# Altium PCB 10515.0502_CVSP1_2020（2拼版）2020.1019.PcbDoc (part 2 of 3)
Units mm, origin at the board's own origin, x right, y up, seen from the top; angles counter-clockwise.
Board outline 162.18 x 163.99 mm, 2 copper layers (Top Layer, Bottom Layer); 124 components, 0 nets, 386 pads, 70 vias.
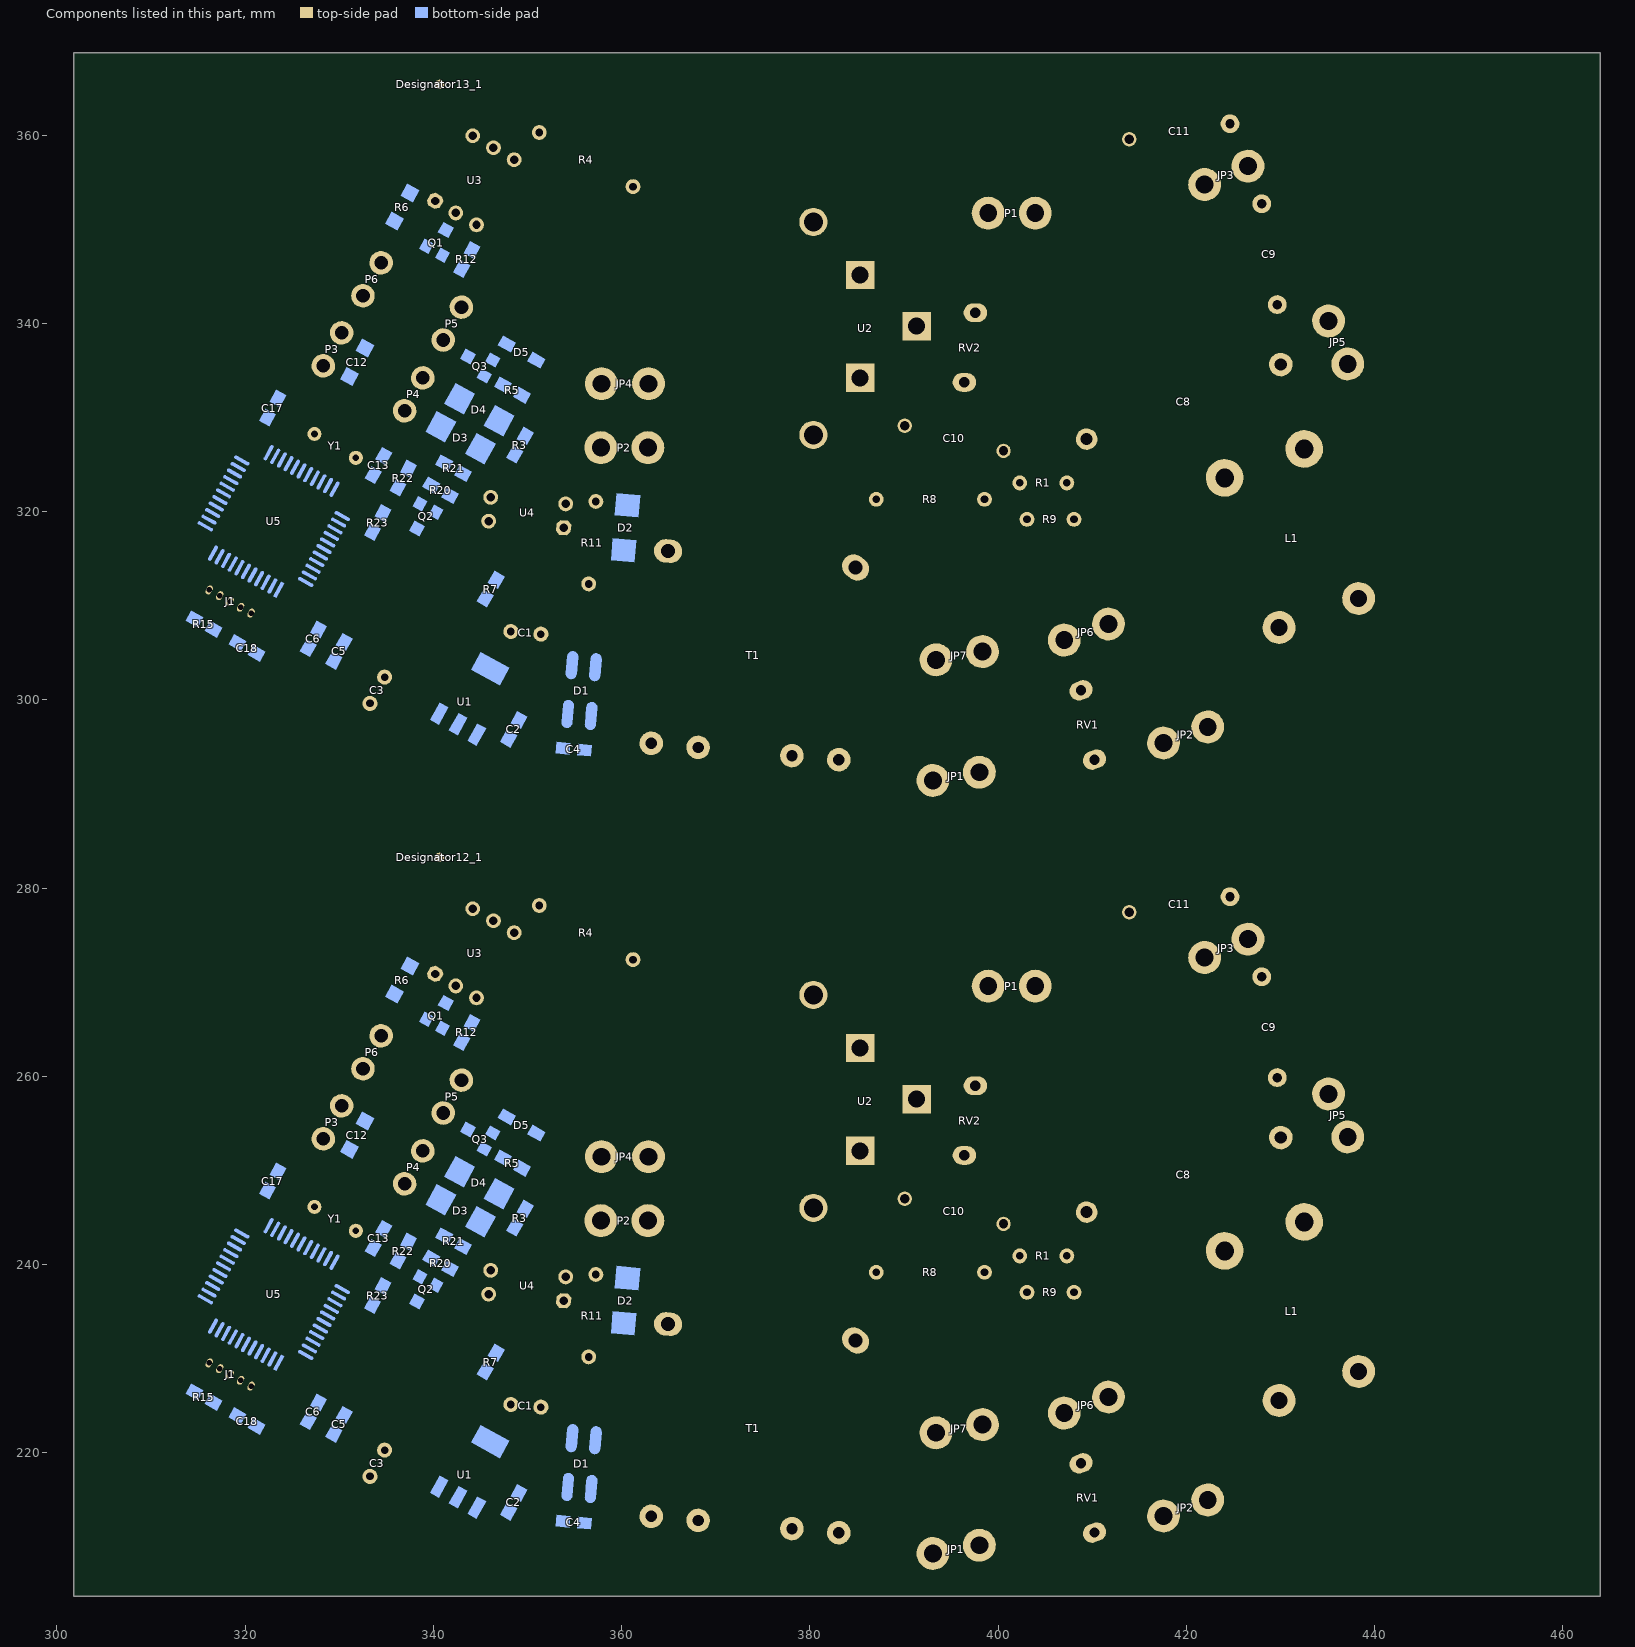
[diagram p2: the components of this part, seen from the top]

## Via types
v1: diameter 0.7, hole 0.4, Top Layer to Bottom Layer, tented both sides, 46 vias
v2: diameter 0.8, hole 0.4, Top Layer to Bottom Layer, tented both sides, 24 vias

## Nets (pads, with @x,y where several pads share a name; then routed paths per layer and width w, separated by ;. In a path a pad name is that pad's centre, name@x,y a point inside that pad or via, vN(x,y) a via of type N, cw(c..) or ccw(c..) an arc to the next point about the centre after c; other vN are vias at no path point) (continued)
copper on no net: | length 5456.2
  Top Layer w0.254: v2(320.85,241.633) 331.778,236.548 ; v2(320.85,323.763) 331.778,318.678 ; v2@320.944,241.376 cw(c321.17,240.757) 321.448,241.355 cw(c321.726,241.952) v2@321.107,241.726 ; v2@320.944,323.506 cw(c321.17,322.887) 321.448,323.485 cw(c321.726,324.082) v2@321.107,323.856 ; v2(324.063,241.128) 331.091,237.729 331.22,237.6 ccw(c333.016,239.396) 333.016,236.856 341.836,236.856 345.877,236.856 ; v2(324.063,323.258) 331.091,319.859 331.22,319.73 ccw(c333.016,321.526) 333.016,318.986 341.836,318.986 345.877,318.986 ; v2@324.153,240.87 cw(c324.369,240.248) 324.656,240.841 cw(c324.943,241.434) v2@324.321,241.218 ; v2@324.153,323 cw(c324.369,322.378) 324.656,322.971 cw(c324.943,323.564) v2@324.321,323.348 ; v2@327.743,244.17 ccw(c327.577,244.808) 328.145,244.475 ccw(c328.714,244.141) v2@328.076,243.975 ; v2@327.743,326.3 ccw(c327.577,326.938) 328.145,326.605 ccw(c328.714,326.271) v2@328.076,326.105 ; v2(327.812,243.906) v2(329.599,246.954) 331.178,249.748 331.305,250.002 v1@334.416,255.844 ; v2(327.812,326.036) v2(329.599,329.084) 331.178,331.878 331.305,332.132 v1@334.416,337.974 ; 329.265,328.515 cw(c329.834,328.182) v2@329.668,328.82 ; 329.266,328.516 ccw(c328.697,328.849) v2@329.335,329.015 ; v2@329.335,246.885 cw(c328.697,246.719) 329.266,246.386 cw(c329.834,246.052) v2@329.668,246.69 ; v2@329.526,247.217 ccw(c329.349,247.852) 329.923,247.528 ccw(c330.497,247.204) v2@329.862,247.027 ; v2@329.526,329.347 ccw(c329.349,329.982) 329.923,329.658 ccw(c330.497,329.334) v2@329.862,329.157 ; 330.259,256.86 330.869,256.477 330.315,256.82 ; 330.259,338.99 330.869,338.607 330.315,338.95 ; 331.235,236.801 cw(c330.899,236.079) v1@331.691,236.156 ; 331.235,318.931 cw(c330.899,318.209) v1@331.691,318.286 ; 331.637,236.614 cw(c331.412,236.129) v1@331.944,236.181 ; 331.637,318.744 cw(c331.412,318.259) v1@331.944,318.311 ; v1@331.74,236.318 ccw(c331.555,236.467) 331.778,236.548 ; v1@331.74,318.448 ccw(c331.555,318.597) 331.778,318.678 ; v1(331.913,236.178) 331.778,236.548 ; v1(331.913,318.308) 331.778,318.678 ; v1@331.955,236.397 cw(c332.001,236.63) 331.778,236.548 ; v1@331.955,318.527 cw(c332.001,318.76) 331.778,318.678 ; 334.107,255.264 cw(c334.699,254.948) v1@334.503,255.59 ; 334.107,337.394 cw(c334.699,337.078) v1@334.503,337.72 ; 334.195,255.428 ccw(c333.836,255.619) v1@334.225,255.738 ; 334.195,337.558 ccw(c333.836,337.749) v1@334.225,337.868 ; v1(335.419,239.012) 336.853,237.578 v1(342.688,237.578) ; v1(335.419,321.142) 336.853,319.708 v1(342.688,319.708) ; 335.513,220.468 335.588,220.181 335.679,219.834 335.691,219.785 335.777,219.457 ; 335.513,302.598 335.588,302.311 335.679,301.964 335.691,301.915 335.777,301.587
  Top Layer w0.3: 318.033,232.476 317.716,231.904 ; 318.033,314.606 317.716,314.035 ; 318.129,227.83 cw(c318.452,227.644) 318.355,228.004 ; 318.129,309.96 cw(c318.452,309.774) 318.355,310.134 ; 318.137,227.843 ccw(c317.832,228.018) 318.171,228.11 ; 318.137,309.973 ccw(c317.832,310.148) 318.171,310.24 ; 318.137,227.831 cw(c318.456,227.653) 318.357,228.004 ; 318.137,309.961 cw(c318.456,309.783) 318.357,310.134 ; 318.139,227.835 ccw(c317.826,228.011) 318.172,228.108 ; 318.139,309.965 ccw(c317.826,310.141) 318.172,310.238 ; 319.524,227.708 320.065,228.729 319.791,229.217 317.779,230.38 316.319,231.142 316.255,231.523 316.573,232.095 317.843,234.127 v2(320.256,238.635) ; 319.524,309.838 320.065,310.86 319.791,311.347 317.779,312.511 316.319,313.273 316.255,313.654 316.573,314.225 317.843,316.257 v2(320.256,320.766) ; 319.577,228.026 ccw(c319.474,228.36) 319.783,228.196 ; 319.577,310.156 ccw(c319.474,310.49) 319.783,310.326 ; 319.764,227.927 cw(c320.123,228.037) 319.791,228.213 ; 319.764,310.057 cw(c320.123,310.167) 319.791,310.343 ; v2@319.999,239.937 cw(c319.531,240.319) 319.591,239.718 cw(c319.651,239.118) v2@320.034,239.585 ; v2@319.999,322.067 cw(c319.531,322.449) 319.591,321.848 cw(c319.651,321.248) v2@320.034,321.715 ; v2@320.016,238.563 cw(c319.439,238.388) 319.971,238.103 cw(c320.503,237.819) v2@320.328,238.396 ; v2@320.016,320.693 cw(c319.439,320.518) 319.971,320.233 cw(c320.503,319.949) v2@320.328,320.526 ; v2(320.192,239.778) 319.557,239.715 317.017,241.112 316.319,241.048 311.246,231.333 311.493,230.253 312.001,228.416 316.636,225.808 316.954,225.872 317.589,226.888 317.7,227.082 ; v2(320.192,321.909) 319.557,321.845 317.017,323.242 316.319,323.179 311.246,313.463 311.493,312.384 312.001,310.546 316.636,307.939 316.954,308.002 317.589,309.018 317.7,309.212 ; v2@320.334,237.164 cw(c319.759,236.983) 320.293,236.704 cw(c320.828,236.424) v2@320.648,237 ; v2@320.334,319.294 cw(c319.759,319.113) 320.293,318.834 cw(c320.828,318.554) v2@320.648,319.13 ; v2(320.573,237.238) 319.113,234.444 317.716,231.904 ; v2(320.573,319.369) 319.113,316.575 317.716,314.035 ; 320.635,227.092 321.335,228.348 320.971,229.174 319.049,230.333 318.007,230.989 317.87,231.42 ; 320.635,309.222 321.335,310.479 320.971,311.304 319.049,312.463 318.007,313.119 317.87,313.55 ; 320.691,227.411 ccw(c320.591,227.761) 320.909,227.584 ; 320.691,309.541 ccw(c320.591,309.891) 320.909,309.714 ; 320.876,227.308 cw(c321.223,227.407) 320.908,227.582 ; 320.876,309.438 cw(c321.223,309.537) 320.908,309.712 ; 317.7,227.082 317.716,227.078 318.413,228.324 317.7,227.082 ; 317.7,309.212 317.716,309.209 318.413,310.454 317.7,309.212 ; 317.716,231.904 317.868,231.426 ; 317.716,314.035 317.868,313.556 ; 317.868,231.426 317.87,231.42 ; 317.868,231.426 317.867,231.421 317.87,231.42 ; 317.868,313.556 317.87,313.55 ; 317.868,313.556 317.867,313.551 317.87,313.55
  Top Layer w0.508: v2(324.955,224.284) 326.415,226.951 327.622,227.512 339.75,221.3 341.211,221.49 343.525,225.863 v2(344.068,226.888) ; v2(324.955,306.415) 326.415,309.082 327.622,309.642 339.75,303.43 341.211,303.621 343.525,307.993 v2(344.068,309.018) ; 334.964,219.761 cw(c335.302,218.487) 335.964,219.627 cw(c336.626,220.766) 335.352,220.429 ; 334.964,301.891 cw(c335.302,300.617) 335.964,301.757 cw(c336.626,302.896) 335.352,302.559 ; 335.738,220.16 335.588,220.181 334.824,220.289 ; 335.738,302.29 335.588,302.311 334.824,302.419 ; v1(337.063,268.106) v1@345.238,264.053 ; v1(337.063,350.236) v1@345.238,346.183 ; 345.328,214.693 349.321,219.329 ; 345.328,296.823 349.321,301.459 ; 345.609,213.913 cw(c344.946,212.876) v2@346.148,213.141 ; 345.609,296.043 cw(c344.946,295.006) v2@346.148,295.271 ; 345.634,213.897 cw(c345.01,212.919) v2@346.147,213.144 ; 345.634,296.027 cw(c345.01,295.049) v2@346.147,295.274 ; 345.946,213.637 ccw(c346.438,213.331) v2@346.044,212.907 ; 345.946,295.767 ccw(c346.438,295.461) v2@346.044,295.037 ; 346.272,214.16 ccw(c346.865,213.791) v2@346.39,213.279 ; 346.272,296.29 ccw(c346.865,295.921) v2@346.39,295.409 ; 347.725,224.972 cw(c346.467,224.577) 347.635,223.967 cw(c348.804,223.356) 348.409,224.614 ; 347.725,307.102 cw(c346.467,306.707) 347.635,306.097 cw(c348.804,305.486) 348.409,306.744 ; 347.911,224.704 cw(c347.376,224.018) 348.246,224.018 ; 347.911,306.834 cw(c347.376,306.148) 348.246,306.148 ; 348.262,222.515 348.246,222.531 348.246,222.837 ; 348.262,304.645 348.246,304.661 348.246,304.967 ; 348.582,224.704 ccw(c349.116,224.018) 348.246,224.018 ; 348.582,306.834 ccw(c349.116,306.148) 348.246,306.148 ; 348.865,217.688 349.256,219.093 ; 348.865,299.818 349.256,301.223 ; 349.543,221.64 ccw(c349.795,222.009) v2@349.877,221.57 ; 349.543,303.77 ccw(c349.795,304.139) v2@349.877,303.7 ; 349.806,219.337 349.91,220.665 v2@349.904,221.394 ; 349.806,301.467 349.91,302.795 v2@349.904,303.524 ; v2@349.829,221.302 cw(c349.205,220.262) 350.382,220.556 ; v2@349.829,303.432 cw(c349.205,302.392) 350.382,302.686 ; 334.824,220.289 335.777,219.457 336.575,218.76 v2(346.291,213.172) ; 334.824,220.289 335.691,219.785 343.687,215.14 345.492,213.987 345.973,213.68 ; 334.824,302.419 335.777,301.587 336.575,300.89 v2(346.291,295.302) ; 334.824,302.419 335.691,301.915 343.687,297.271 345.492,296.117 345.973,295.81 ; 345.973,213.68 v2(346.291,213.172) ; 345.973,213.68 346.412,214.385 346.724,214.887 346.962,215.269 347.751,216.537 349.256,219.093 ; 345.973,295.81 v2(346.291,295.302) ; 345.973,295.81 346.412,296.515 346.724,297.017 346.962,297.399 347.751,298.668 349.256,301.223 ; v2(346.291,213.172) 350.418,220.411 350.228,221.173 v2@349.904,221.394 ; v2(346.291,295.302) 350.418,302.541 350.228,303.303 v2@349.904,303.524 ; 348.246,222.837 347.751,223.332 347.751,223.522 348.246,224.018 ; 348.246,222.837 349.15,221.933 349.15,221.909 ; 348.246,222.837 348.246,224.018 ; 348.246,224.018 348.246,225.135 347.37,223.459 347.624,222.951 347.889,222.77 349.15,221.909 ; 348.246,304.967 347.751,305.462 347.751,305.653 348.246,306.148 ; 348.246,304.967 349.15,304.063 349.15,304.039 ; 348.246,304.967 348.246,306.148 ; 348.246,306.148 348.246,307.265 347.37,305.589 347.624,305.081 347.889,304.9 349.15,304.039 ; 349.15,221.909 349.889,221.404 v2@349.896,221.399 ; 349.15,304.039 349.889,303.534 v2@349.896,303.529 ; 349.256,219.093 349.321,219.329 ; 349.256,301.223 349.321,301.459 ; 349.321,219.329 v2@349.896,221.399 ; 349.321,301.459 v2@349.896,303.529 ; v2@349.896,221.399 v2(349.904,221.427) v2@349.904,221.394 ; v2@349.896,221.399 v2@349.904,221.394 ; v2@349.896,303.529 v2(349.904,303.557) v2@349.904,303.524 ; v2@349.896,303.529 v2@349.904,303.524
  Top Layer w0.6: 353.847,236.159 362.483,235.27 v1(366.353,238.196) ; 353.847,318.289 362.483,317.4 v1(366.353,320.326) ; 354.155,235.781 cw(c354.897,234.868) 355.018,236.039 cw(c355.138,237.209) 354.225,236.467 ; 354.155,317.911 cw(c354.897,316.998) 355.018,318.169 cw(c355.138,319.339) 354.225,318.597
  Top Layer w0.8: 328.213,257.928 330.259,256.86 ; 328.213,340.058 330.259,338.99 ; 329.411,255.329 330.259,256.86 ; 329.411,337.459 330.259,338.99 ; 329.448,256.605 ccw(c327.49,255.99) 328.44,257.809 ccw(c329.389,259.629) 330.004,257.671 ; 329.448,338.735 ccw(c327.49,338.12) 328.44,339.939 ccw(c329.389,341.759) 330.004,339.801 ; v2(329.599,246.954) v1@334.416,255.844 ; v2(329.599,329.084) v1@334.416,337.974 ; 330.035,257.68 ccw(c329.495,259.66) 331.277,258.642 ccw(c333.059,257.623) 331.079,257.084 ; 330.035,339.81 ccw(c329.495,341.79) 331.277,340.772 ccw(c333.059,339.753) 331.079,339.214 ; 330.495,256.043 cw(c331.063,254.071) 332.055,255.868 cw(c333.047,257.664) 331.076,257.095 ; 330.495,338.173 cw(c331.063,336.201) 332.055,337.998 cw(c333.047,339.794) 331.076,339.225 ; 331.313,258.704 330.259,256.86 ; 331.313,340.834 330.259,338.99 ; 331.938,265.816 334.463,264.303 ; 331.938,347.946 334.463,346.433 ; 332.438,255.656 330.259,256.86 ; 332.438,337.786 330.259,338.99 ; 333.615,262.772 334.463,264.303 ; 333.615,344.902 334.463,346.433 ; 333.638,264.096 ccw(c331.648,263.598) 332.703,265.358 ccw(c333.758,267.118) 334.256,265.128 ; 333.638,346.226 ccw(c331.648,345.728) 332.703,347.488 ccw(c333.758,349.248) 334.256,347.258 ; 334.209,265.114 ccw(c333.597,267.073) 335.415,266.121 ccw(c337.233,265.169) 335.274,264.557 ; 334.209,347.244 ccw(c333.597,349.203) 335.415,348.251 ccw(c337.233,347.299) 335.274,346.687 ; v1(334.438,255.803) 337.742,262.411 ; v1(334.438,337.933) 337.742,344.541 ; 334.463,263.453 cw(c334.463,261.401) 335.914,262.852 cw(c337.365,264.303) 335.313,264.303 ; 334.463,345.583 cw(c334.463,343.531) 335.914,344.982 cw(c337.365,346.433) 335.313,346.433 ; 335.788,266.832 334.463,264.303 ; 335.788,348.962 334.463,346.433 ; 336.688,253.116 338.888,252.078 ; 336.688,335.246 338.888,334.208 ; 338.04,250.547 338.888,252.078 ; 338.04,332.677 338.888,334.208 ; 338.088,251.791 ccw(c336.156,251.098) 337.032,252.954 ccw(c337.908,254.81) 338.601,252.878 ; 338.088,333.921 ccw(c336.156,333.228) 337.032,335.084 ccw(c337.908,336.94) 338.601,335.008 ; v1(338.163,243.703) 345.125,239.916 346.099,239.387 ; v1(338.163,325.833) 345.125,322.046 346.099,321.517 ; 339.069,251.248 cw(c339.506,249.242) 340.615,250.969 cw(c341.724,252.696) 339.719,252.259 ; 339.069,333.378 cw(c339.506,331.372) 340.615,333.099 cw(c341.724,334.826) 339.719,334.389 ; 339.897,253.81 338.888,252.078 ; 339.897,335.94 338.888,334.208 ; v1(340.313,235.628) 340.313,235.278 340.813,234.778 343.788,234.778 344.363,234.203 344.363,227.183 v2(344.068,226.888) ccw(c343.356,227.6) 344.363,227.6 ; v1(340.313,317.758) 340.313,317.408 340.813,316.908 343.788,316.908 344.363,316.333 344.363,309.313 v2(344.068,309.018) ccw(c343.356,309.73) 344.363,309.73 ; 340.913,250.778 338.888,252.078 ; 340.913,332.908 338.888,334.208 ; 341.049,256.105 348.899,248.254 349.913,247.24 v1(349.913,243.378) 349.913,230.132 351.434,228.611 351.434,224.856 ; 341.049,338.235 348.899,330.384 349.913,329.37 v1(349.913,325.508) 349.913,312.262 351.434,310.741 351.434,306.986 ; 345.887,239.711 ccw(c345.375,240.494) 346.291,240.302 ccw(c347.206,240.11) 346.423,239.598 ; 345.887,321.841 ccw(c345.375,322.624) 346.291,322.432 ccw(c347.206,322.24) 346.423,321.728 ; 346.099,238.999 cw(c346.099,237.034) 347.488,238.424 ; 346.099,321.129 cw(c346.099,319.164) 347.488,320.554 ; 346.501,225.328 348.246,225.135 ; 346.501,241.303 346.099,239.387 ; 346.501,307.458 348.246,307.265 ; 346.501,323.433 346.099,321.517 ; 347.934,224.885 ccw(c347.18,224.281) 347.286,225.241 ccw(c347.393,226.201) 347.996,225.447 ; 347.934,307.015 ccw(c347.18,306.411) 347.286,307.371 ccw(c347.393,308.331) 347.996,307.577 ; 347.963,225.418 ccw(c347.28,226.101) 348.246,226.101 ccw(c349.212,226.101) 348.529,225.418 ; 347.963,307.548 ccw(c347.28,308.231) 348.246,308.231 ccw(c349.212,308.231) 348.529,307.548 ; 348.503,224.828 cw(c349.124,224.089) 349.208,225.051 cw(c349.292,226.013) 348.553,225.392 ; 348.503,306.958 cw(c349.124,306.219) 349.208,307.181 cw(c349.292,308.143) 348.553,307.522 ; 349.541,225.022 348.246,225.135 ; 349.541,307.152 348.246,307.265 ; v1@349.963,251.503 349.963,256.461 344.111,262.313 336.453,262.313 334.463,264.303 ; v1@349.963,333.633 349.963,338.591 344.111,344.443 336.453,344.443 334.463,346.433 ; 351.151,225.139 ccw(c350.468,225.822) 351.434,225.822 ccw(c352.4,225.822) 351.717,225.139 ; 351.151,307.269 ccw(c350.468,307.952) 351.434,307.952 ccw(c352.4,307.952) 351.717,307.269 ; 398.957,269.585 403.957,269.585 411.809,277.437 413.942,277.437 ; 398.957,351.715 403.957,351.715 411.809,359.567 413.942,359.567 ; 399.912,268.631 cw(c402.217,266.326) 402.217,269.585 cw(c402.217,272.845) 399.912,270.54 ; 399.912,350.761 cw(c402.217,348.456) 402.217,351.715 cw(c402.217,354.975) 399.912,352.67 ; 403.003,268.631 ccw(c400.698,266.326) 400.698,269.585 ccw(c400.698,272.845) 403.003,270.54 ; 403.003,350.761 ccw(c400.698,348.456) 400.698,351.715 ccw(c400.698,354.975) 403.003,352.67 ; 403.957,270.935 ccw(c403.957,274.195) 406.262,271.89 ccw(c408.567,269.585) 405.307,269.585 ; 403.957,353.065 ccw(c403.957,356.325) 406.262,354.02 ccw(c408.567,351.715) 405.307,351.715 ; 408.889,246.1 ccw(c407.621,247.368) 409.415,247.368 ccw(c411.209,247.368) 409.94,246.1 ; 408.889,328.23 ccw(c407.621,329.498) 409.415,329.498 ccw(c411.209,329.498) 409.94,328.23 ; 409.415,245.575 409.415,256.926 ; 409.415,327.705 409.415,339.056 ; 413.686,277.181 ccw(c413.068,276.563) 413.068,277.437 ccw(c413.068,278.311) 413.686,277.693 ; 413.686,359.311 ccw(c413.068,358.693) 413.068,359.567 ccw(c413.068,360.441) 413.686,359.823 ; 345.277,239.833 cw(c344.83,239.012) 345.727,239.277 ; 345.277,239.833 ccw(c345.724,240.655) 345.989,239.758 ; 345.277,239.833 cw(c344.83,239.012) 345.727,239.277 ; 345.277,239.833 ccw(c345.724,240.655) 345.989,239.758 ; 345.277,239.833 cw(c344.83,239.012) 345.727,239.277 ; 345.277,239.833 ccw(c345.724,240.655) 345.989,239.758 ; 345.277,321.963 cw(c344.83,321.142) 345.727,321.407 ; 345.277,321.963 ccw(c345.724,322.785) 345.989,321.888 ; 345.277,321.963 cw(c344.83,321.142) 345.727,321.407 ; 345.277,321.963 ccw(c345.724,322.785) 345.989,321.888 ; 345.277,321.963 cw(c344.83,321.142) 345.727,321.407 ; 345.277,321.963 ccw(c345.724,322.785) 345.989,321.888 ; 346.099,239.387 346.525,239.387 348.246,237.666 348.246,225.135 ; 346.099,321.517 346.525,321.517 348.246,319.796 348.246,307.265
  Top Layer w1: v2(329.177,224.697) 334.226,221.681 334.824,220.289 335.679,219.834 345.328,214.693 ; v2(329.177,306.827) 334.226,303.811 334.824,302.419 335.679,301.964 345.328,296.823 ; 335.691,219.785 337.395,218.796 ; 335.691,301.915 337.395,300.926 ; 346.037,214.315 345.328,214.693 ; 346.037,296.445 345.328,296.823 ; 346.71,215.18 348.122,217.167 ; 346.71,297.31 348.122,299.297 ; 346.962,215.269 345.328,214.693 ; 346.962,297.399 345.328,296.823 ; 384.869,231.934 390.535,229.746 399.336,229.746 405.35,225.535 ; 384.869,314.064 390.535,311.876 399.336,311.876 405.35,307.665 ; 385.364,231.088 cw(c386.209,229.179) 386.961,231.126 ; 385.364,313.218 cw(c386.209,311.309) 386.961,313.256 ; 385.746,232.077 ccw(c387.149,232.698) 386.596,231.267 ; 385.746,314.207 ccw(c387.149,314.828) 386.596,313.397 ; 404.413,226.192 cw(c402.466,223.411) 405.809,224.001 ; 404.413,308.322 cw(c402.466,305.541) 405.809,306.131 ; 404.849,225.886 ccw(c406.364,228.05) 406.822,225.449 ; 404.849,308.016 ccw(c406.364,310.18) 406.822,307.579 ; 417.57,213.268 417.58,213.287 ; 417.57,295.398 417.58,295.417
  Top Layer w2: 393.419,222.126 395.581,222.507 ; 393.419,304.256 395.581,304.637 ; 393.588,222.003 393.089,209.31 398.013,210.178 398.343,222.994 396.615,222.69 ; 393.588,304.133 393.089,291.44 398.013,292.308 398.343,305.124 396.615,304.82 ; 394.689,209.592 395.581,222.507 ; 394.689,291.722 395.581,304.637 ; 396.393,209.892 396.615,222.69 ; 396.393,292.022 396.615,304.82 ; 406.816,223.502 cw(c405.04,217.8) 410.328,220.576 ; 406.816,305.632 cw(c405.04,299.93) 410.328,302.706 ; 407.595,225.338 cw(c405.709,221.534) 409.732,222.89 ; 407.595,307.468 cw(c405.709,303.664) 409.732,305.02 ; 408.034,224.946 410.843,219.594 ; 408.034,307.076 410.843,301.724 ; 408.612,223.844 cw(c402.945,220.87) 409.056,218.965 ; 408.612,305.974 cw(c402.945,303) 409.056,301.095 ; 408.983,225.114 410.843,219.594 ; 408.983,307.244 410.843,301.724 ; 411.219,223.478 cw(c413.976,223.211) 412.215,225.349 ; 411.219,305.608 cw(c413.976,305.341) 412.215,307.479 ; 411.418,225.543 410.843,219.594 ; 411.418,307.673 410.843,301.724 ; 420.752,272.272 cw(c423.539,273.087) 421.015,274.522 ; 420.752,354.402 cw(c423.539,355.217) 421.015,356.652 ; 420.884,271.972 cw(c424.191,273.987) 420.905,276.035 ; 420.884,354.102 cw(c424.191,356.117) 420.905,358.165 ; 421.322,276.705 cw(c425.859,273.878) 424.65,279.085 ; 421.322,358.835 cw(c425.859,356.008) 424.65,361.215 ; 421.745,273.344 ccw(c421.055,275.751) 423.245,274.537 ; 421.745,355.474 ccw(c421.055,357.881) 423.245,356.667 ; 422.316,273.279 ccw(c423.678,275.738) 424.453,273.035 ; 422.316,355.409 ccw(c423.678,357.868) 424.453,355.165 ; 422.592,273.013 cw(c427.295,275.878) 422.621,278.79 ; 422.592,355.143 cw(c427.295,358.008) 422.621,360.92 ; 422.672,272.833 cw(c429.845,274.93) 423.349,278.625 ; 422.672,354.963 cw(c429.845,357.06) 423.349,360.755 ; 422.787,277.637 cw(c425.466,276.113) 424.65,279.085 ; 422.787,359.767 cw(c425.466,358.243) 424.65,361.215 ; 423.385,271.138 cw(c425.021,265.268) 428.015,270.576 ; 423.385,353.268 cw(c425.021,347.398) 428.015,352.706 ; 423.546,271.183 ccw(c422.709,274.184) 425.808,274.5 ; 423.546,353.313 ccw(c422.709,356.314) 425.808,356.63 ; 424.179,272.957 ccw(c423.536,275.198) 425.82,274.728 ; 424.179,355.087 ccw(c423.536,357.328) 425.82,356.858 ; 424.361,276.549 ccw(c421.444,278.166) 424.65,279.085 ; 424.361,358.679 ccw(c421.444,360.296) 424.65,361.215 ; 424.676,280.571 cw(c422.869,279.86) 424.65,279.085 ; 424.676,362.701 cw(c422.869,361.99) 424.65,361.215 ; 424.939,274.912 424.433,276.679 425.014,277.729 ; 424.939,357.042 424.433,358.809 425.014,359.859 ; 425.681,278.016 ccw(c423.875,277.305) 424.65,279.085 ; 425.681,360.146 ccw(c423.875,359.435) 424.65,361.215 ; 425.831,271.82 ccw(c425.104,274.429) 427.798,274.703 ; 425.831,353.95 ccw(c425.104,356.559) 427.798,356.833 ; 425.867,274.876 ccw(c422.807,276.207) 425.912,277.429 ; 425.867,357.006 ccw(c422.807,358.337) 425.912,359.559 ; 425.899,274.94 ccw(c422.974,276.561) 426.188,277.483 ; 425.899,357.07 ccw(c422.974,358.691) 426.188,359.613 ; 426.168,273.934 cw(c424.447,271.068) 427.69,271.877 ; 426.168,356.064 cw(c424.447,353.198) 427.69,354.007 ; 426.337,276.963 ccw(c422.932,275.987) 424.65,279.085 ; 426.337,359.093 ccw(c422.932,358.117) 424.65,361.215 ; 427.063,272.163 422.885,270.999 ; 427.063,354.294 422.885,353.129 ; 428.041,225.027 cw(c428.624,223.182) 429.517,224.899 ; 428.041,307.157 cw(c428.624,305.312) 429.517,307.029 ; 430.346,225.755 410.843,219.594 ; 430.346,307.885 410.843,301.724 ; 395.581,222.507 396.615,222.69 ; 395.581,304.637 396.615,304.82 ; 409.056,218.965 ccw(c405.327,223.494) 411.165,222.928 cw(c405.327,223.494) 409.056,218.965 ; 409.056,301.095 ccw(c405.327,305.624) 411.165,305.058 cw(c405.327,305.624) 409.056,301.095 ; 422.339,272.902 425.014,277.729 ; 422.339,272.902 422.384,272.747 ; 422.339,272.902 422.384,272.747 ; 422.339,355.032 425.014,359.859 ; 422.339,355.032 422.384,354.877 ; 422.339,355.032 422.384,354.877 ; 422.384,272.747 422.464,272.465 ; 422.384,272.747 422.464,272.465 ; 422.384,354.877 422.464,354.595 ; 422.384,354.877 422.464,354.595 ; 422.464,272.465 422.885,270.999 ; 422.464,272.465 422.885,270.999 ; 422.464,272.465 423.93,272.885 ; 422.464,354.595 422.885,353.129 ; 422.464,354.595 422.885,353.129 ; 422.464,354.595 423.93,355.015 ; 422.885,270.999 423.354,271.846 423.93,272.885 ; 422.885,270.999 421.747,272.464 420.649,273.878 423.865,279.531 424.419,280.506 ; 422.885,353.129 423.354,353.976 423.93,355.015 ; 422.885,353.129 421.747,354.594 420.649,356.008 423.865,361.661 424.419,362.636 ; 423.93,272.885 424.348,273.639 426.635,274.295 427.057,274.416 ; 423.93,272.885 426.649,273.665 427.013,274.322 427.06,274.405 ; 423.93,355.015 424.348,355.769 426.635,356.425 427.057,356.546 ; 423.93,355.015 426.649,355.795 427.013,356.452 427.06,356.535 ; 424.419,280.506 424.65,279.085 ; 424.419,280.506 424.269,281.434 423.321,279.913 419.666,274.047 419.443,273.687 420.295,271.853 421.538,269.179 428.015,270.576 ; 424.419,280.506 424.586,280.799 425.179,279.293 425.471,278.552 ; 424.419,362.636 424.65,361.215 ; 424.419,362.636 424.269,363.565 423.321,362.043 419.666,356.177 419.443,355.818 420.295,353.983 421.538,351.309 428.015,352.706 ; 424.419,362.636 424.586,362.93 425.179,361.423 425.471,360.682 ; 425.014,277.729 425.471,278.552 ; 425.014,359.859 425.471,360.682 ; 425.471,278.552 425.504,278.612 425.742,279.041 426.986,274.7 ; 425.471,278.552 426.97,274.74 426.986,274.7 ; 425.471,360.682 425.504,360.742 425.742,361.171 426.986,356.83 ; 425.471,360.682 426.97,356.87 426.986,356.83 ; 426.986,274.7 427.067,274.419 ; 426.986,274.7 426.99,274.685 427.057,274.416 ; 426.986,356.83 427.067,356.549 ; 426.986,356.83 426.99,356.815 427.057,356.546 ; 427.057,274.416 427.06,274.405 ; 427.057,274.416 427.067,274.419 ; 427.057,356.546 427.06,356.535 ; 427.057,356.546 427.067,356.549 ; 427.06,274.405 428.015,270.576 ; 427.06,274.405 427.067,274.419 ; 427.06,356.535 428.015,352.706 ; 427.06,356.535 427.067,356.549 ; 422.608,272.259 cw(c425.136,270.858) 424.339,273.636 ccw(c425.136,270.858) 422.608,272.259 ; 422.608,354.389 cw(c425.136,352.988) 424.339,355.766 ccw(c425.136,352.988) 422.608,354.389
  Top Layer w4: 408.983,225.114 411.418,225.543 416.267,226.398 ; 408.983,307.244 411.418,307.673 416.267,308.528 ; 411.123,222.493 430.346,225.755 ; 411.123,304.623 430.346,307.885 ; 411.593,225.724 ccw(c417.734,234.375) 419.509,223.916 ; 411.593,307.854 ccw(c417.734,316.505) 419.509,306.046 ; 416.267,226.398 406.494,224.675 408.674,219.765 430.346,225.755 ; 416.267,226.398 426.78,228.252 430.346,225.755 ; 416.267,308.528 406.494,306.805 408.674,301.895 430.346,307.885 ; 416.267,308.528 426.78,310.382 430.346,307.885
  Top Layer w5: 428.168,259.747 cw(c429.712,259.873) 428.531,260.875 ; 428.168,341.877 cw(c429.712,342.003) 428.531,343.005 ; 428.486,260.822 cw(c429.667,259.82) 429.541,261.364 ; 428.486,342.952 cw(c429.667,341.95) 429.541,343.494 ; 429.663,259.869 429.669,259.761 ; 429.663,341.999 429.669,341.891 ; 430.38,258.615 cw(c424.297,254.845) 431.264,253.209 ; 430.38,340.745 cw(c424.297,336.975) 431.264,335.339 ; 435.127,250.954 434.524,251.928 432.58,255.064 431.914,256.139 429.669,259.761 ; 435.127,333.085 434.524,334.058 432.58,337.194 431.914,338.269 429.669,341.891 ; 435.332,247.076 ccw(c428.891,253.392) 437.911,253.578 ; 435.332,329.206 ccw(c428.891,335.522) 437.911,335.708 ; 429.669,259.761 430.047,253.495 ; 429.669,259.761 429.619,259.842 429.539,259.971 429.681,259.921 434.508,258.22 ; 429.669,341.891 430.047,335.625 ; 429.669,341.891 429.619,341.972 429.539,342.102 429.681,342.051 434.508,340.35 ; 430.047,253.495 433.022,244.719 ; 430.047,253.495 427.331,258.637 427.063,259.146 428.508,260.849 429.92,262.511 431.101,261.407 434.508,258.22 ; 430.047,335.625 433.022,326.849 ; 430.047,335.625 427.331,340.767 427.063,341.276 428.508,342.979 429.92,344.642 431.101,343.537 434.508,340.35 ; 433.022,244.719 437.161,253.562 435.043,257.597 ; 433.022,244.719 441.558,246.255 439.568,251.395 ; 433.022,244.719 439.471,251.296 439.568,251.395 ; 433.022,326.849 437.161,335.692 435.043,339.727 ; 433.022,326.849 441.558,328.386 439.568,333.525 ; 433.022,326.849 439.471,333.426 439.568,333.525 ; 434.508,258.22 434.764,258.13 434.842,257.981 435.043,257.597 ; 434.508,258.22 434.764,257.981 434.819,257.905 435.043,257.597 ; 434.508,340.35 434.764,340.26 434.842,340.111 435.043,339.727 ; 434.508,340.35 434.764,340.111 434.819,340.035 435.043,339.727 ; 435.043,257.597 437.7,253.955 439.568,251.395 ; 435.043,339.727 437.7,336.085 439.568,333.525 ; 426.681,259.869 ccw(c429.264,261.233) 430.084,258.429 cw(c429.264,261.233) 426.681,259.869 ; 426.681,341.999 ccw(c429.264,343.363) 430.084,340.559 cw(c429.264,343.363) 426.681,341.999 ; 430.333,254.711 cw(c428.697,247.744) 434.78,251.514 ccw(c428.697,247.744) 430.333,254.711 ; 430.333,336.841 cw(c428.697,329.874) 434.78,333.644 ccw(c428.697,329.874) 430.333,336.841 ; 437.464,254.248 cw(c436.18,251.341) 439.144,252.489 ccw(c436.18,251.341) 437.464,254.248 ; 437.464,336.378 cw(c436.18,333.471) 439.144,334.619 ccw(c436.18,333.471) 437.464,336.378
  Top Layer w6: 409.606,211.252 428.029,216.849 432.514,218.212 436.792,219.511 439.307,221.975 438.804,228.833 ; 409.606,293.382 428.029,298.979 432.514,300.342 436.792,301.641 439.307,304.105 438.804,310.963 ; 443.706,224.256 439.129,228.833 438.804,228.833 ; 443.706,306.386 439.129,310.963 438.804,310.963 ; 446.154,235.716 437.482,235.716 ccw(c437.482,234.345) 436.513,235.315 438.06,233.768 cw(c436.264,231.972) 438.804,231.972 438.804,228.833 ; 446.154,317.846 437.482,317.846 ccw(c437.482,316.475) 436.513,317.445 438.06,315.898 cw(c436.264,314.102) 438.804,314.102 438.804,310.963
  Bottom Layer w0.254: 316.192,229.555 317.271,230.698 318.605,230.634 319.392,231.91 321.716,235.778 322.542,236.239 324.929,240.34 ; 316.192,311.685 317.271,312.828 318.605,312.765 319.392,314.04 321.716,317.908 322.542,318.369 324.929,322.47 ; 316.284,229.903 ccw(c316.267,230.49) 316.694,230.087 ; 316.284,312.033 ccw(c316.267,312.62) 316.694,312.217 ; 316.461,229.735 cw(c316.71,229.742) 316.529,229.912 ; 316.461,311.865 cw(c316.71,311.872) 316.529,312.042 ; 317.302,228.939 318.16,229.809 319.113,229.936 ; 317.302,311.069 318.16,311.939 319.113,312.066 ; 317.398,229.287 ccw(c317.394,229.889) 317.822,229.466 ; 317.398,311.417 ccw(c317.394,312.019) 317.822,311.596 ; 318.891,231.098 cw(c319.136,230.946) 319.07,231.227 ; 318.891,313.228 cw(c319.136,313.076) 319.07,313.357 ; 319.266,242.614 v2(320.85,241.633) ; 319.266,324.744 v2(320.85,323.763) ; 319.59,230.71 cw(c319.836,230.558) 319.77,230.839 ; 319.59,312.84 cw(c319.836,312.688) 319.77,312.969 ; 319.714,232.593 ccw(c319.651,232.845) 319.874,232.711 ; 319.714,314.723 ccw(c319.651,314.975) 319.874,314.841 ; 319.949,242.291 ccw(c320.232,242.358) 320.079,242.11 ; 319.949,324.421 ccw(c320.232,324.488) 320.079,324.24 ; 320.29,324.11 ccw(c320.637,324.67) v2@320.788,324.029 ; 320.29,324.11 cw(c319.943,323.549) v2@320.585,323.7 ; v2@320.585,241.57 ccw(c319.943,241.419) 320.29,241.98 ccw(c320.637,242.54) v2@320.788,241.899 ; 323.812,227.205 319.113,229.936 ; 323.812,309.336 319.113,312.066 ; 325.442,241.307 cw(c325.811,241.11) 325.689,241.511 ; 325.442,323.437 cw(c325.811,323.24) 325.689,323.641 ; 325.548,241.405 cw(c325.744,241.291) 325.686,241.51 ; 325.548,323.535 cw(c325.744,323.421) 325.686,323.64 ; 325.792,241.966 324.929,240.34 ; 325.792,324.096 324.929,322.47 ; 326.007,242.193 324.929,240.34 ; 326.007,324.323 324.929,322.47 ; 327.116,242.439 cw(c327.334,242.506) 327.132,242.613 ; 327.116,324.569 cw(c327.334,324.636) 327.132,324.743 ; v2@327.551,243.825 cw(c326.922,243.63) 327.505,243.323 cw(c328.088,243.016) v2@327.893,243.645 ; v2@327.551,325.955 cw(c326.922,325.76) 327.505,325.453 cw(c328.088,325.146) v2@327.893,325.775 ; v2(327.812,243.906) 326.707,241.805 325.463,239.574 323.393,235.862 322.288,235.46 320.092,231.522 319.113,229.936 ; v2(327.812,326.036) 326.707,323.935 325.463,321.704 323.393,317.992 322.288,317.591 320.092,313.652 319.113,312.066 ; 329.4,232.285 330.221,232.285 331.763,233.828 343.363,233.828 343.988,234.453 343.988,238.376 cw(c346.528,238.376) 344.732,240.172 344.938,240.378 cw(c346.658,238.658) 346.658,241.09 350.2,241.09 352.895,243.785 352.895,254.721 343.938,263.678 343.013,263.678 ; 329.4,314.416 330.221,314.416 331.763,315.958 343.363,315.958 343.988,316.583 343.988,320.506 cw(c346.528,320.506) 344.732,322.302 344.938,322.508 cw(c346.658,320.788) 346.658,323.22 350.2,323.22 352.895,325.915 352.895,336.851 343.938,345.808 343.013,345.808 ; v1@331.913,235.955 cw(c331.913,235.369) 332.328,235.783 ; v1@331.913,318.085 cw(c331.913,317.499) 332.328,317.913 ; v1@332.059,236.052 332.758,235.353 333.188,235.353 333.538,235.703 ; v1@332.059,318.182 332.758,317.483 333.188,317.483 333.538,317.833 ; v1@332.136,236.178 ccw(c332.626,236.178) 332.28,235.831 ; v1@332.136,318.308 ccw(c332.626,318.308) 332.28,317.961 ; 350.962,253.955 351.963,252.955 351.963,243.728 350.063,241.828 346.663,241.828 345.538,241.828 343.363,239.653 343.363,238.253 ; 350.962,336.085 351.963,335.085 351.963,325.858 350.063,323.958 346.663,323.958 345.538,323.958 343.363,321.783 343.363,320.383 ; 343.363,238.253 v1(342.688,237.578) 343.363,238.253 ; 343.363,320.383 v1(342.688,319.708) 343.363,320.383
  Bottom Layer w0.3: 316.88,224.836 cw(c317.201,223.711) 317.77,224.733 ; 316.88,306.966 cw(c317.201,305.841) 317.77,306.863 ; 317.214,225.435 ccw(c318.34,225.756) 317.771,224.733 ; 317.214,307.565 ccw(c318.34,307.886) 317.771,306.863 ; 317.326,239.115 v2@320.383,237.365 ; 317.326,321.245 v2@320.383,319.496 ; 317.714,239.815 319.557,238.826 v2(320.256,238.635) ; 317.714,321.945 319.557,320.956 v2(320.256,320.766) ; 318.074,224.564 cw(c317.504,223.54) 318.631,223.861 ; 318.074,306.694 cw(c317.504,305.67) 318.631,305.991 ; 318.075,224.563 ccw(c318.644,225.586) 318.965,224.46 ; 318.075,306.693 ccw(c318.644,307.716) 318.965,306.59 ; 318.102,240.515 319.557,239.715 v2(320.192,239.778) ; 318.102,322.645 319.557,321.845 v2(320.192,321.909) ; 318.115,227.827 cw(c318.446,227.629) 318.352,228.003 ; 318.115,309.957 cw(c318.446,309.759) 318.352,310.133 ; 318.132,227.856 ccw(c317.842,228.03) 318.171,228.112 ; 318.132,309.986 ccw(c317.842,310.16) 318.171,310.242 ; 318.413,228.324 316.636,225.364 319.209,223.932 ; 318.413,310.454 316.636,307.494 319.209,306.062 ; 318.693,232.298 320.637,235.968 321.145,236.159 321.653,236.984 v2@324.074,241.118 ; 318.693,314.428 320.637,318.099 321.145,318.289 321.653,319.115 v2@324.074,323.248 ; v2@319.999,239.937 cw(c319.531,240.319) 319.591,239.718 cw(c319.651,239.118) v2@320.034,239.585 ; v2@319.999,322.067 cw(c319.531,322.449) 319.591,321.848 cw(c319.651,321.248) v2@320.034,321.715 ; 320.024,237.571 cw(c319.698,237.001) v2@320.332,237.173 ; 320.024,319.701 cw(c319.698,319.131) v2@320.332,319.303 ; v2@320.038,238.511 ccw(c319.514,238.212) 319.673,238.794 ccw(c319.832,239.377) v2@320.131,238.853 ; v2@320.038,320.641 ccw(c319.514,320.342) 319.673,320.924 ccw(c319.832,321.507) v2@320.131,320.983 ; 320.09,237.533 ccw(c320.363,238.011) v2@320.507,237.48 ; 320.09,319.663 ccw(c320.363,320.141) v2@320.507,319.61 ; 322.386,247.876 325.272,246.255 326.034,246.636 327.367,246.128 328.164,245.63 328.892,245.176 329.146,244.541 327.644,241.753 ; 322.386,330.006 325.272,328.386 326.034,328.767 327.367,328.258 328.164,327.76 328.892,327.306 329.146,326.671 327.644,323.883 ; 322.517,247.409 cw(c322.834,246.281) 323.407,247.302 cw(c323.98,248.324) 322.853,248.007 ; 322.517,329.539 cw(c322.834,328.411) 323.407,329.432 cw(c323.98,330.454) 322.853,330.137 ; 323.753,240.57 ccw(c323.189,240.9) v2@323.821,241.065 ; 323.753,322.7 ccw(c323.189,323.03) v2@323.821,323.195 ; 323.788,240.63 cw(c324.266,240.35) v2@324.126,240.886 ; 323.788,322.76 cw(c324.266,322.48) v2@324.126,323.016 ; 327.406,241.417 328.447,243.271 ; 327.406,323.547 328.447,325.401 ; 327.731,242.077 ccw(c327.656,242.329) 327.887,242.204 ; 327.731,324.207 ccw(c327.656,324.459) 327.887,324.334 ; 327.997,233.2 329.4,232.285 ; 327.997,315.33 329.4,314.416 ; 328.307,253.409 329.282,253.67 ; 328.307,335.539 329.282,335.8 ; 328.658,232.871 ccw(c328.944,232.932) 328.784,232.687 ; 328.658,315.001 ccw(c328.944,315.062) 328.784,314.817 ; 329.082,242.826 328.106,241.029 329.781,244.16 330.352,244.35 331.767,243.589 333.625,241.78 ; 329.082,324.957 328.106,323.159 329.781,326.29 330.352,326.481 331.767,325.719 333.625,323.91 ; 332.55,242.826 ccw(c333.659,243.965) 333.68,242.376 ; 332.55,324.956 ccw(c333.659,326.095) 333.68,324.506 ; 332.974,242.413 cw(c332.449,241.874) 333.202,241.884 ; 332.974,324.543 cw(c332.449,324.004) 333.202,324.014 ; 333.069,242.321 ccw(c333.673,242.941) 333.684,242.076 ; 333.069,324.451 ccw(c333.673,325.071) 333.684,324.206 ; 345.877,236.856 346.608,235.46 346.672,230.634 ; 345.877,318.986 346.608,317.591 346.672,312.765
  Bottom Layer w0.5: 328.323,253.369 331.039,252.21 ; 328.323,335.499 331.039,334.34 ; 330.648,256.635 330.997,256.442 ; 330.648,338.765 330.997,338.572 ; 353.847,236.159 ccw(c355.329,235.566) 354.736,234.083 ; 353.847,318.289 ccw(c355.329,317.696) 354.736,316.213
  Bottom Layer w0.508: 314.406,226.896 ccw(c313.983,228.181) 315.191,227.571 ; 314.406,309.026 ccw(c313.983,310.311) 315.191,309.701 ; 316.192,229.555 314.637,226.472 314.459,226.295 ccw(c316.255,224.499) 313.715,224.499 313.715,224.284 321.77,220.02 ; 316.192,311.685 314.637,308.602 314.459,308.425 ccw(c316.255,306.629) 313.715,306.629 313.715,306.415 321.77,302.15 ; 321.208,222.824 323.431,226.634 323.812,227.205 324.637,227.332 327.812,225.364 325.717,226.57 ; 321.208,304.954 323.431,308.764 323.812,309.336 324.637,309.463 327.812,307.494 325.717,308.701 ; 321.688,222.859 cw(c322.996,223.204) 321.827,223.886 ; 321.688,304.989 cw(c322.996,305.334) 321.827,306.016 ; 323.494,249.875 326.034,248.414 326.733,248.541 v2(329.599,246.954) 334.491,244.244 ; 323.494,332.005 326.034,330.545 326.733,330.672 v2(329.599,329.084) 334.491,326.374 ; 323.593,249.507 cw(c323.833,248.619) 324.291,249.416 cw(c324.75,250.214) 323.862,249.974 ; 323.593,331.637 cw(c323.833,330.749) 324.291,331.547 cw(c324.75,332.344) 323.862,332.104 ; v2(324.955,224.284) 326.704,223.365 ; v2(324.955,306.415) 326.704,305.495 ; 326.237,222.41 ccw(c325.391,222.824) 326.282,223.13 ; 326.237,304.54 ccw(c325.391,304.954) 326.282,305.26 ; 326.251,222.439 cw(c327.057,222.044) 326.766,222.893 ; 326.251,304.569 cw(c327.057,304.174) 326.766,305.023 ; 326.34,223.252 ccw(c325.461,222.979) 325.89,223.793 ccw(c326.318,224.607) 326.591,223.728 ; 326.34,305.382 ccw(c325.461,305.109) 325.89,305.923 ccw(c326.318,306.737) 326.591,305.858 ; 326.765,226.013 ccw(c327.478,227.163) 327.787,225.846 ; 326.765,308.143 ccw(c327.478,309.293) 327.787,307.976 ; 327.126,223.6 ccw(c328.405,224.039) 327.811,222.824 ; 327.126,305.73 ccw(c328.405,306.169) 327.811,304.954 ; 327.444,225.265 ccw(c326.556,225.026) 327.015,225.823 ccw(c327.474,226.62) 327.713,225.732 ; 327.444,307.395 ccw(c326.556,307.156) 327.015,307.953 ccw(c327.474,308.75) 327.713,307.862 ; 328.327,222.572 cw(c327.733,221.356) 329.012,221.796 ; 328.327,304.702 cw(c327.733,303.486) 329.012,303.926 ; 330.259,256.86 332.701,255.209 ; 330.259,338.99 332.701,337.339 ; 330.448,255.882 cw(c330.904,253.521) 332.251,255.513 cw(c333.598,257.505) 331.237,257.049 ; 330.448,338.012 cw(c330.904,335.651) 332.251,337.643 cw(c333.598,339.635) 331.237,339.179 ; 330.543,224.03 334.207,221.726 334.48,221.554 334.82,220.288 334.888,220.035 ; 330.543,306.161 334.207,303.856 334.48,303.684 334.82,302.418 334.888,302.165 ; 330.566,223.548 cw(c330.866,222.229) 331.586,223.374 ; 330.566,305.678 cw(c330.866,304.359) 331.586,305.504 ; 331.179,256.238 cw(c329.889,254.33) 332.15,254.767 ; 331.179,338.368 cw(c329.889,336.46) 332.15,336.897 ; 332.195,255.551 cw(c331.592,254.659) 332.649,254.863 ; 332.195,337.681 cw(c331.592,336.789) 332.649,336.993 ; 333.273,217.49 336.829,215.458 338.163,216.22 341.528,222.506 343.179,222.824 346.056,221.178 342.628,215.303 ; 333.273,299.62 336.829,297.588 338.163,298.35 341.528,304.637 343.179,304.954 346.056,303.308 342.628,297.433 ; 333.336,217.236 333.176,217.34 328.828,220.157 cw(c330.068,220.791) 329.434,222.031 326.704,223.365 ; 333.336,299.366 333.176,299.47 328.828,302.287 cw(c330.068,302.921) 329.434,304.161 326.704,305.495 ; 333.726,244.668 cw(c333.011,243.378) 334.429,243.785 ; 333.726,326.798 cw(c333.011,325.508) 334.429,325.915 ; 334.351,220.561 ccw(c333.223,221.212) 334.481,221.55 ; 334.351,302.691 ccw(c333.223,303.342) 334.481,303.68 ; 334.48,221.553 ccw(c335.723,221.887) 335.092,220.765 ; 334.48,303.683 ccw(c335.723,304.017) 335.092,302.895 ; 335.863,268.728 v1(337.063,268.106) ; 335.863,350.858 v1(337.063,350.236) ; 336.013,268.256 cw(c336.375,267.114) 336.926,268.177 cw(c337.477,269.24) 336.336,268.878 ; 336.013,350.386 cw(c336.375,349.244) 336.926,350.307 cw(c337.477,351.37) 336.336,351.008 ; 342.807,216.049 ccw(c342.615,216.778) 343.267,216.398 ; 342.807,298.179 ccw(c342.615,298.908) 343.267,298.528 ; 343.169,215.838 cw(c343.822,216.009) 343.238,216.349 ; 343.169,297.968 cw(c343.822,298.139) 343.238,298.479 ; v2(344.068,226.888) 344.849,227.832 345.528,228.655 348.79,228.655 349.888,229.753 349.888,239.378 353.638,242.928 353.617,254.961 345.664,262.886 ; v2(344.068,309.018) 344.849,309.962 345.528,310.785 348.79,310.785 349.888,311.883 349.888,321.508 353.638,325.058 353.617,337.091 345.664,345.016 ; 344.64,214.188 346.312,213.208 346.481,213.108 348.005,213.743 ; 344.64,296.318 346.312,295.338 346.481,295.239 348.005,295.874 ; 344.714,213.902 cw(c344.895,213.21) 345.256,213.827 cw(c345.617,214.443) 344.926,214.263 ; 344.714,296.032 cw(c344.895,295.34) 345.256,295.957 cw(c345.617,296.573) 344.926,296.393 ; v1@345.238,264.003 345.664,262.886 ; v1(345.238,264.053) 345.24,263.308 345.664,262.886 ; v1@345.238,346.133 345.664,345.016 ; v1(345.238,346.183) 345.24,345.438 345.664,345.016 ; 345.861,228.495 cw(c346.246,228.11) 346.246,228.655 ; 345.861,229.034 ccw(c346.777,229.95) 346.777,228.655 ; 345.861,310.625 cw(c346.246,310.24) 346.246,310.785 ; 345.861,311.164 ccw(c346.777,312.08) 346.777,310.785 ; 345.921,213.437 cw(c345.671,213.01) v2@346.149,213.135 ; 345.921,295.567 cw(c345.671,295.14) v2@346.149,295.265 ; v2@346.346,213.307 ccw(c346.652,214.049) 346.96,213.308 ; v2@346.346,295.437 ccw(c346.652,296.179) 346.96,295.438 ; 346.888,213.278 cw(c347.346,212.181) 347.798,213.28 ; 346.888,295.408 cw(c347.346,294.311) 347.798,295.41 ; 347.24,213.425 ccw(c346.99,214.025) 347.591,213.777 ; 347.24,295.555 ccw(c346.99,296.155) 347.591,295.907 ; 347.725,224.972 cw(c346.466,224.58) 347.634,223.968 cw(c348.801,223.355) 348.409,224.614 ; 347.725,307.102 cw(c346.466,306.71) 347.634,306.098 cw(c348.801,305.485) 348.409,306.744 ; 347.86,225.521 ccw(c346.928,226.453) 348.246,226.453 ccw(c349.564,226.453) 348.632,225.521 ; 347.86,307.651 ccw(c346.928,308.583) 348.246,308.583 ccw(c349.564,308.583) 348.632,307.651 ; 347.893,224.719 cw(c347.243,223.954) 348.246,223.954 ; 347.893,306.849 cw(c347.243,306.084) 348.246,306.084 ; 347.905,225.562 ccw(c347.083,226.592) 348.393,226.445 ccw(c349.703,226.298) 348.673,225.476 ; 347.905,307.692 ccw(c347.083,308.722) 348.393,308.575 ccw(c349.703,308.428) 348.673,307.606 ; 348.051,225.645 ccw(c347.58,226.876) 348.784,226.339 ccw(c349.987,225.801) 348.756,225.33 ; 348.051,307.775 ccw(c347.58,309.006) 348.784,308.469 ccw(c349.987,307.931) 348.756,307.46 ; 348.41,225.656 cw(c348.637,226.38) 347.878,226.38 ; 348.41,307.786 cw(c348.637,308.51) 347.878,308.51 ; 348.6,224.719 ccw(c349.25,223.954) 348.246,223.954 ; 348.6,306.849 ccw(c349.25,306.084) 348.246,306.084 ; 348.958,226.951 348.831,226.824 348.831,226.443 ; 348.958,309.082 348.831,308.955 348.831,308.574 ; 349.352,221.883 348.246,222.989 ; 349.352,304.013 348.246,305.119 ; v2(349.904,221.427) 347.624,222.887 347.434,223.586 347.804,224.293 ; v2(349.904,303.557) 347.624,305.018 347.434,305.716 347.804,306.423 ; 355.708,226.06 357.041,225.289 ; 355.708,308.19 357.041,307.419 ; 357.063,222.486 ccw(c356.607,222.972) 357.273,222.951 ; 357.063,304.616 ccw(c356.607,305.102) 357.273,305.081 ; 357.071,222.493 ccw(c356.565,223.07) 357.331,223.02 ; 357.071,304.623 ccw(c356.565,305.2) 357.331,305.15 ; 357.085,222.505 ccw(c356.511,223.232) 357.431,223.124 ; 357.085,304.635 ccw(c356.511,305.362) 357.431,305.254 ; 357.281,223.189 ccw(c358.285,223.156) 357.552,222.47 ; 357.281,305.319 ccw(c358.285,305.286) 357.552,304.6 ; 357.337,223.116 ccw(c358.239,223.058) 357.56,222.462 ; 357.337,305.246 ccw(c358.239,305.188) 357.56,304.592 ; 357.416,222.996 ccw(c358.155,222.909) 357.571,222.448 ; 357.416,305.126 ccw(c358.155,305.039) 357.571,304.578 ; 321.77,220.02 322.415,219.649 322.495,219.636 ; 321.77,220.02 322.495,219.636 ; 321.77,302.15 322.415,301.779 322.495,301.766 ; 321.77,302.15 322.495,301.766 ; 322.495,219.636 323.431,219.141 324.637,219.141 326.704,223.365 ; 322.495,301.766 323.431,301.271 324.637,301.271 326.704,305.495 ; 347.804,224.293 347.907,224.293 348.246,223.954 ; 347.804,224.293 348.246,225.135 ; 347.804,306.423 347.907,306.423 348.246,306.084 ; 347.804,306.423 348.246,307.265 ; 347.878,226.38 347.878,225.503 348.246,225.135 ; 347.878,226.38 348.246,226.748 ; 347.878,308.51 347.878,307.633 348.246,307.265 ; 347.878,308.51 348.246,308.878 ; 348.246,222.989 348.246,223.954 ; 348.246,222.989 347.878,223.357 347.878,223.586 348.246,223.954 ; 348.246,223.954 348.246,225.135 ; 348.246,225.135 348.45,226.951 ; 348.246,225.135 348.831,226.443 ; 348.246,225.135 348.246,226.748 ; 348.246,226.748 348.45,226.951 ; 348.246,305.119 348.246,306.084 ; 348.246,305.119 347.878,305.487 347.878,305.716 348.246,306.084 ; 348.246,306.084 348.246,307.265 ; 348.246,307.265 348.45,309.082 ; 348.246,307.265 348.831,308.574 ; 348.246,307.265 348.246,308.878 ; 348.246,308.878 348.45,309.082 ; 348.45,226.951 349.148,227.396 349.674,227.334 ; 348.45,309.082 349.148,309.526 349.674,309.464 ; 348.831,226.443 349.674,227.334 ; 348.831,308.574 349.674,309.464 ; 349.674,227.334 351.307,227.142 357.019,226.231 357.491,225.483 ; 349.674,227.334 349.466,226.824 351.688,226.697 356.895,225.872 357.041,225.289 ; 349.674,309.464 351.307,309.272 357.019,308.361 357.491,307.613 ; 349.674,309.464 349.466,308.955 351.688,308.828 356.895,308.002 357.041,307.419 ; 357.041,225.289 357.276,224.348 357.327,224.62 ; 357.041,307.419 357.276,306.478 357.327,306.75 ; 357.221,221.337 357.675,225.193 357.491,225.483 ; 357.221,221.337 357.491,225.483 ; 357.221,221.337 357.327,224.62 ; 357.221,303.467 357.675,307.323 357.491,307.613 ; 357.221,303.467 357.491,307.613 ; 357.221,303.467 357.327,306.75 ; 357.327,224.62 357.491,225.483 ; 357.327,306.75 357.491,307.613